# Altium PCB pblaze_ext.PcbDoc
Units mil, origin at the board's own origin, x right, y up, seen from the top; angles counter-clockwise.
Board outline 6000 x 4000 mil, 2 copper layers (Top Layer, Bottom Layer); 18 components, 80 nets, 236 pads, 45 vias.
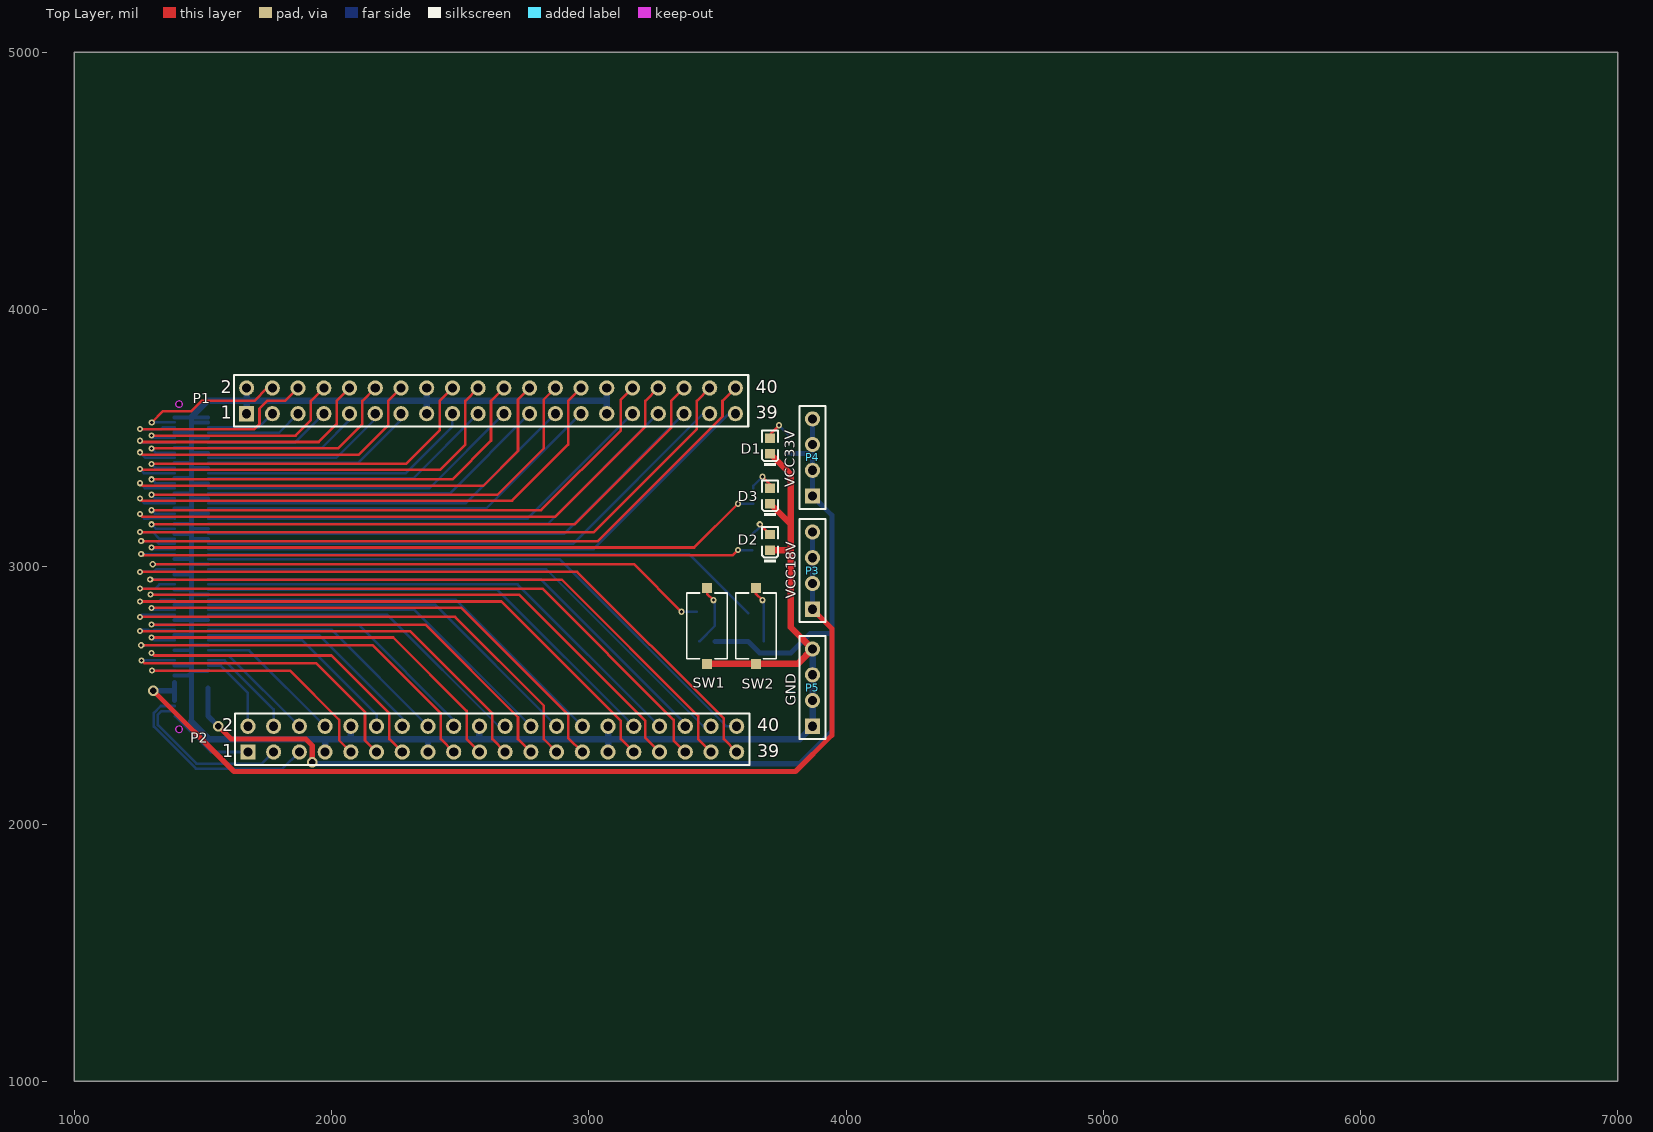
[diagram p0: Top Layer view]
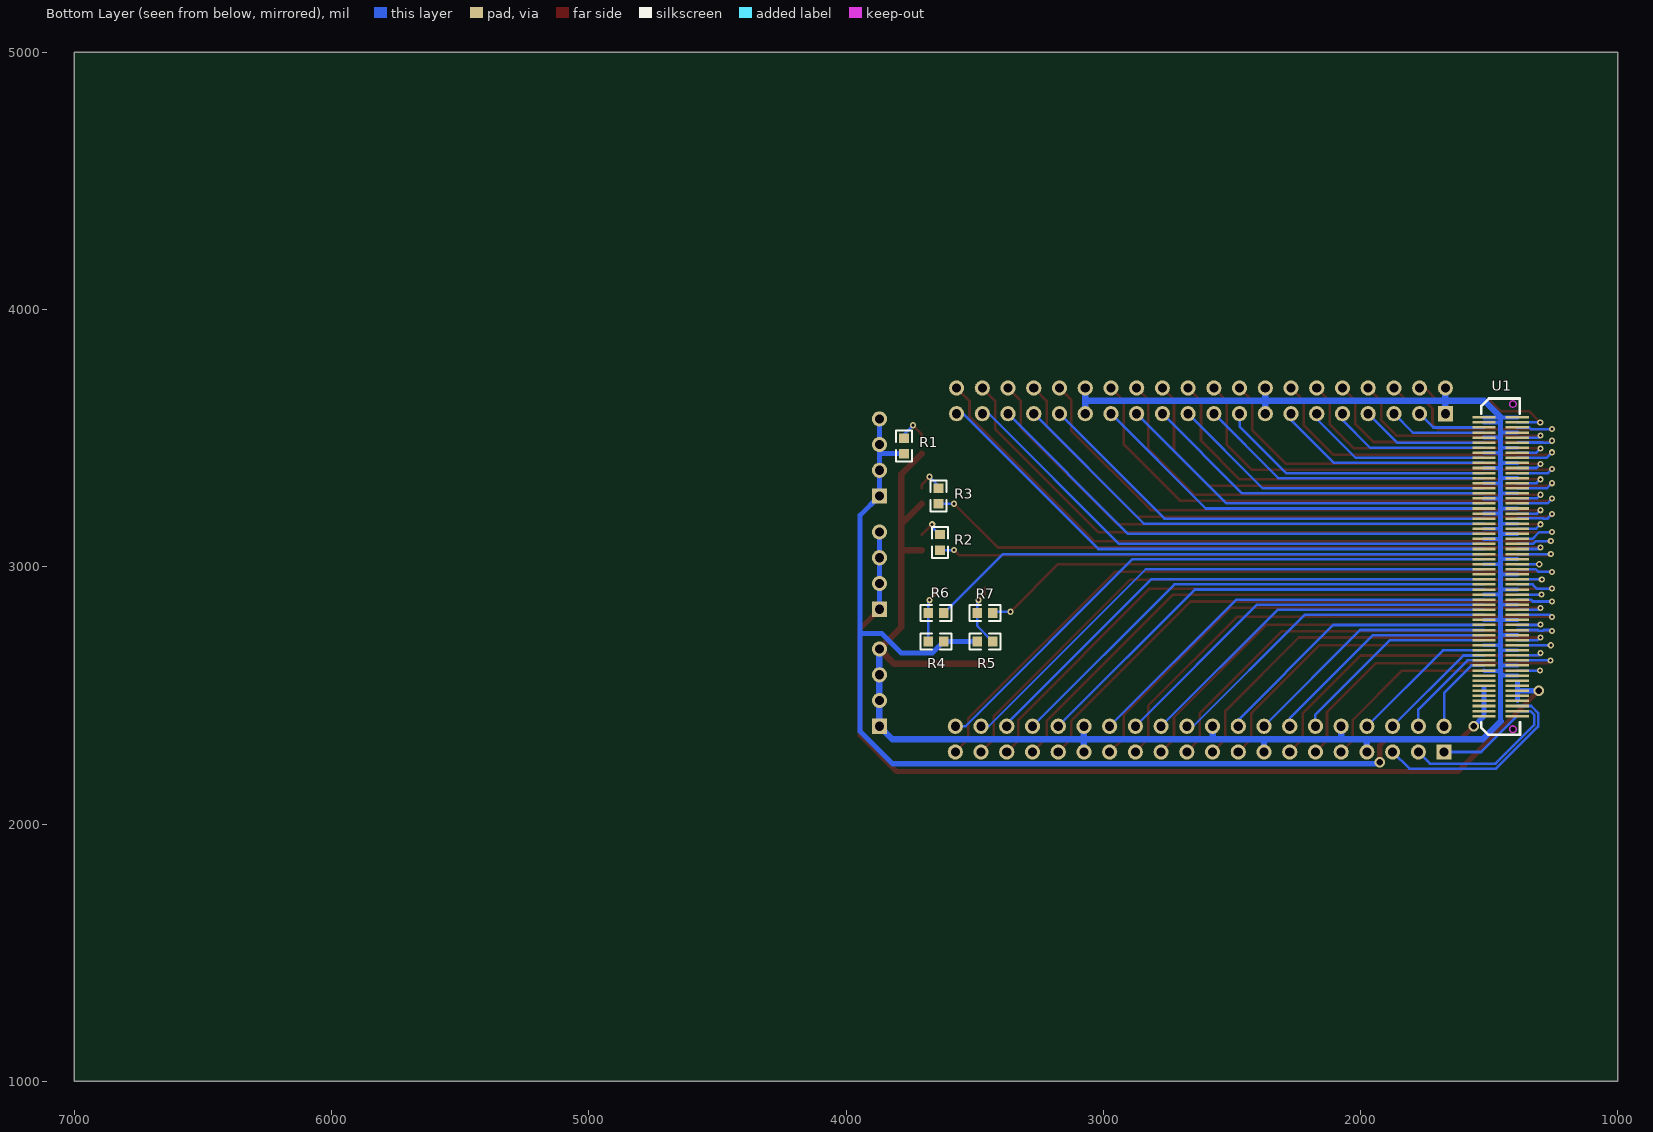
[diagram p1: Bottom Layer view, seen from below]
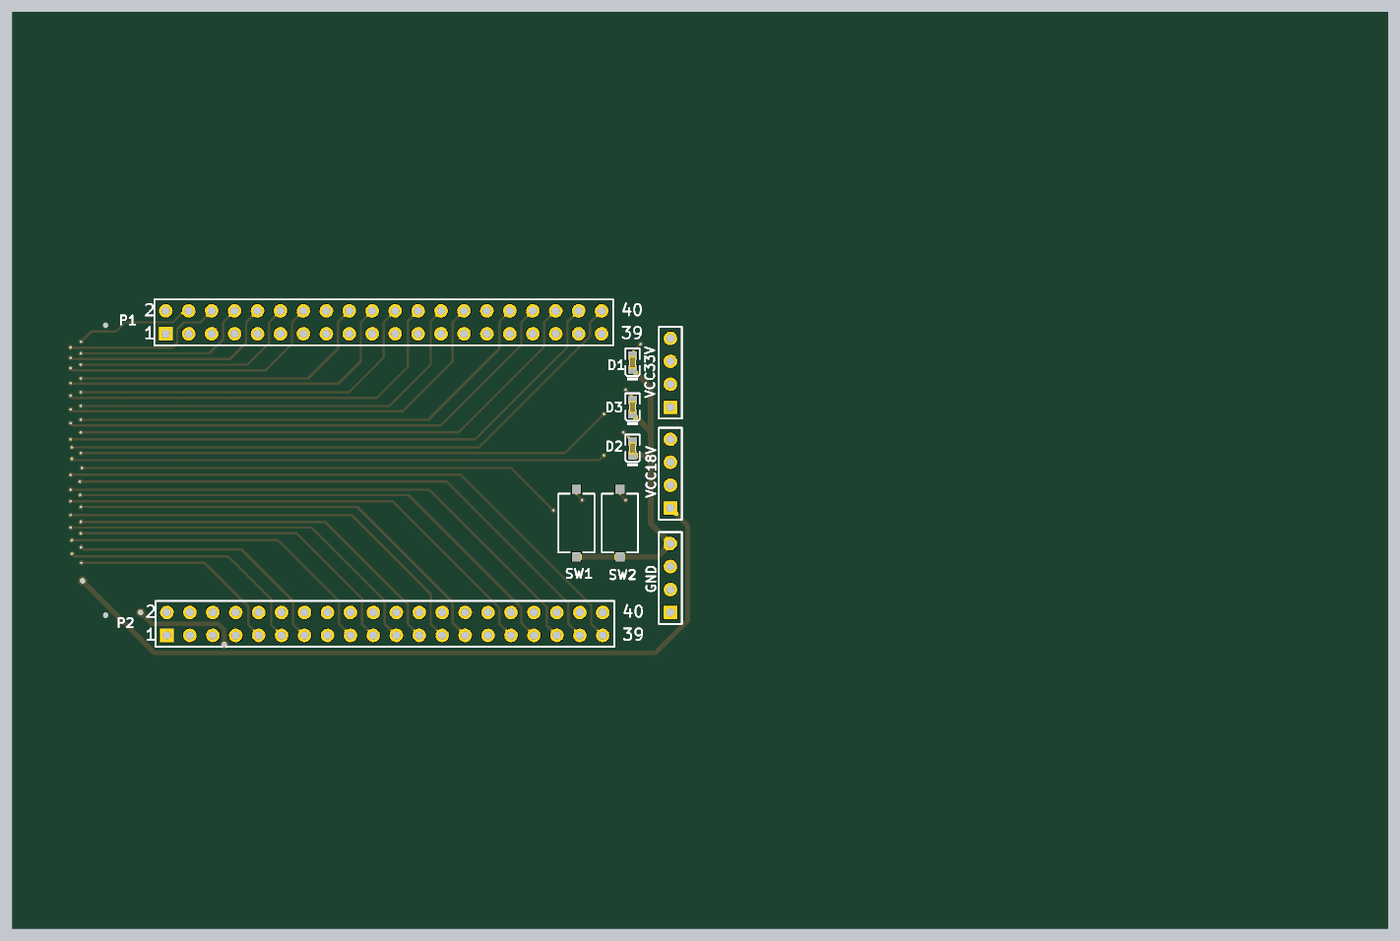
[diagram p2: 3D render of the assembled board from above, using the file's embedded part models]
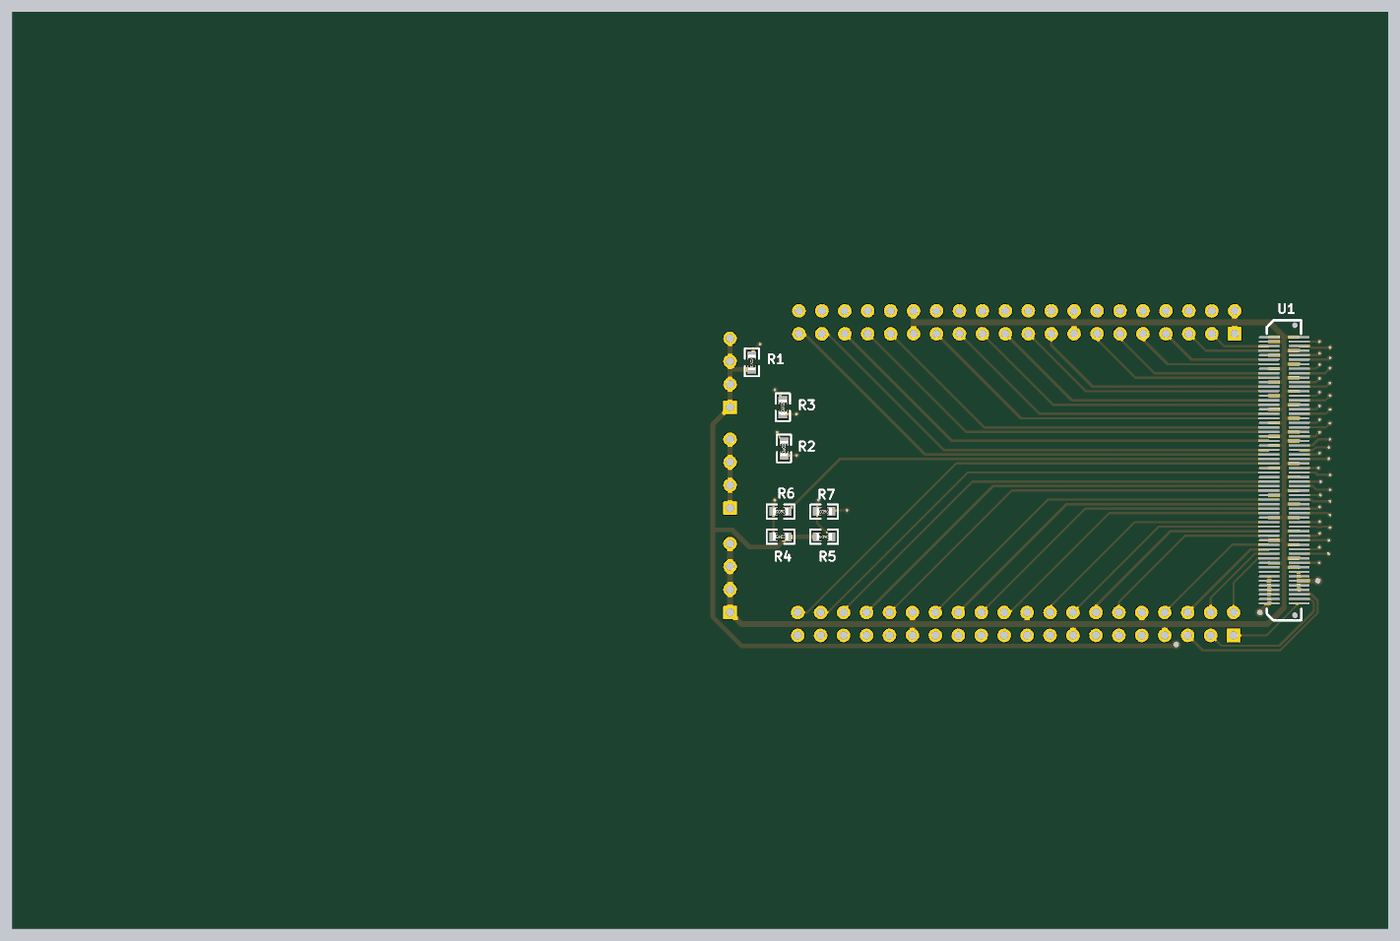
[diagram p3: 3D render of the assembled board from below, using the file's embedded part models]

## Layer stack, top to bottom
Top Solder: solder mask 0.4, Solder Resist, Dk 3.5
Top Layer: signal copper 1.4
Dielectric 1: dielectric 12.6, FR-4, Dk 4.8
Bottom Layer: signal copper 1.4
Bottom Solder: solder mask 0.4, Solder Resist, Dk 3.5

## Board outline
1000,1000 7000,1000 7000,5000 1000,5000

## Design rules (kind name [scope] priority, off if disabled: settings)
Clearance [All] p1: gap=6
MinimumSolderMaskSliver [All] p1 off: minsoldermaskwidth=10
PolygonConnect [All] p1: connectstyle=Relief reliefconductorwidth=10 reliefentries=4 polygonreliefangle="90 Angle" airgapwidth=10
RoutingVias [All] p1: holewidth=20 width=50 viastyle="Through Hole" minholewidth=12 minwidth=24 maxholewidth=60 maxwidth=80
SilkToSilkClearance [All] p1 off: silktosilkclearance=10
SilkToSolderMaskClearance [IsPad] p1 off: minsilkscreentomaskgap=10 clearancetoexposedcopper=TRUE
SolderMaskExpansion [All] p1: expansion=4
Width [All] p1: maxlimit=100 minlimit=6 preferedwidth=10
27 further rules are at their usual default settings.

## Components (designator, comment, footprint, x,y, rotation, side; value= is the part's Value field where it differs from the comment)
D1 "LED 0603" 0603_LED_S1 3705,3470 r90 top
D2 "LED 0603" 0603_LED_S1 3705,3095 r90 top
D3 "LED 0603" 0603_LED_S1 3705,3275 r90 top
P1 "Header 20X2" HDR2X20 1670,3595 r0 top
P2 "Header 20X2" HDR2X20 1675,2280 r0 top
P3 "VCC18V" HDR1X4 3870,2835 r90 top
P4 "VCC33V" HDR1X4 3870,3275 r90 top
P5 "GND" HDR1X4 3870,2380 r90 top
R1 "10K" 0603_R 3775,3470 r90 bottom
R2 "1K" 0603_R 3635,3095 r90 bottom
R3 "1K" 0603_R 3640,3275 r90 bottom
R4 "10K" 0603_R 3650,2710 r180 bottom
R5 "10K" 0603_R 3460,2710 r0 bottom
R6 "1K" 0603_R 3650,2820 r0 bottom
R7 "1K" 0603_R 3460,2820 r0 bottom
SW1 "SW-PB" "SW-2- 3.8X7.6-S" 3460,2770 r0 top
SW2 "SW-PB" "SW-2- 3.8X7.6-S" 3650,2770 r0 top
U1 "AXK6A2337YG" CONN-SMD_120P-P0.50_AXK6A2337YG 1454.96,3000.12 r90 bottom

## Footprints (in the part's own frame and the unit in brackets; to place one, negate y for a bottom-side part, rotate by r counter-clockwise, add the part's x,y. Pads: shape width x height; smd on the part's side, far side on the other; paste and mask are expansions set on the pad)
0603_LED_S1 [mm]
  rect 0.93x0.98 smd: A(0.77,0) K(-0.77,0)
  silkscreen extent -1.98,-0.79 1.54,0.79, body extent -0.8,-0.4 0.8,0.4, height 0.6
0603_R [mm]
  rect 0.93x0.98 smd: 1(-0.77,0) 2(0.77,0)
  silkscreen extent -1.53,-0.79 1.54,0.79, body extent -0.85,-0.4 0.85,0.4, height 0.56
CONN-SMD_120P-P0.50_AXK6A2337YG [mm]
  rect 0.25x2.3 smd paste+0 mask+0.05: 1(-14.75,1.65) 2(-14.75,-1.65) 3(-14.25,1.65) 4(-14.25,-1.65) 5(-13.75,1.65) 6(-13.75,-1.65) 7(-13.25,1.65) 8(-13.25,-1.65) 9(-12.75,1.65) 10(-12.75,-1.65) 11(-12.25,1.65) 12(-12.25,-1.65) 13(-11.75,1.65) 14(-11.75,-1.65) 15(-11.25,1.65) 16(-11.25,-1.65) 17(-10.75,1.65) 18(-10.75,-1.65) 19(-10.25,1.65) 20(-10.25,-1.65) 21(-9.75,1.65) 22(-9.75,-1.65) 23(-9.25,1.65) 24(-9.25,-1.65) 25(-8.75,1.65) 26(-8.75,-1.65) 27(-8.25,1.65) 28(-8.25,-1.65) 29(-7.75,1.65) 30(-7.75,-1.65) 31(-7.25,1.65) 32(-7.25,-1.65) 33(-6.75,1.65) 34(-6.75,-1.65) 35(-6.25,1.65) 36(-6.25,-1.65) 37(-5.75,1.65) 38(-5.75,-1.65) 39(-5.25,1.65) 40(-5.25,-1.65) 41(-4.75,1.65) 42(-4.75,-1.65) 43(-4.25,1.65) 44(-4.25,-1.65) 45(-3.75,1.65) 46(-3.75,-1.65) 47(-3.25,1.65) 48(-3.25,-1.65) 49(-2.75,1.65) 50(-2.75,-1.65) 51(-2.25,1.65) 52(-2.25,-1.65) 53(-1.75,1.65) 54(-1.75,-1.65) 55(-1.25,1.65) 56(-1.25,-1.65) 57(-0.75,1.65) 58(-0.75,-1.65) 59(-0.25,1.65) 60(-0.25,-1.65) 61(0.25,1.65) 62(0.25,-1.65) 63(0.75,1.65) 64(0.75,-1.65) 65(1.25,1.65) 66(1.25,-1.65) 67(1.75,1.65) 68(1.75,-1.65) 69(2.25,1.65) 70(2.25,-1.65) 71(2.75,1.65) 72(2.75,-1.65) 73(3.25,1.65) 74(3.25,-1.65) 75(3.75,1.65) 76(3.75,-1.65) 77(4.25,1.65) 78(4.25,-1.65) 79(4.75,1.65) 80(4.75,-1.65) 81(5.25,1.65) 82(5.25,-1.65) 83(5.75,1.65) 84(5.75,-1.65) 85(6.25,1.65) 86(6.25,-1.65) 87(6.75,1.65) 88(6.75,-1.65) 89(7.25,1.65) 90(7.25,-1.65) 91(7.75,1.65) 92(7.75,-1.65) 93(8.25,1.65) 94(8.25,-1.65) 95(8.75,1.65) 96(8.75,-1.65) 97(9.25,1.65) 98(9.25,-1.65) 99(9.75,1.65) 100(9.75,-1.65) 101(10.25,1.65) 102(10.25,-1.65) 103(10.75,1.65) 104(10.75,-1.65) 105(11.25,1.65) 106(11.25,-1.65) 107(11.75,1.65) 108(11.75,-1.65) 109(12.25,1.65) 110(12.25,-1.65) 111(12.75,1.65) 112(12.75,-1.65) 113(13.25,1.65) 114(13.25,-1.65) 115(13.75,1.65) 116(13.75,-1.65) 117(14.25,1.65) 118(14.25,-1.65) 119(14.75,1.65) 120(14.75,-1.65)
  Keep-Out Layer circle w0.005: c-16.05,-1.2 r0.325
  Keep-Out Layer circle w0.005: c16.05,-1.2 r0.325
  Keep-Out Layer board cut-out: -16.05,-0.875 -16.115,-0.875 -16.234,-0.924 -16.325,-1.016 -16.375,-1.135 -16.375,-1.265 -16.325,-1.384 -16.234,-1.475 -16.115,-1.525 -16.05,-1.525 -15.985,-1.525 -15.866,-1.475 -15.774,-1.384 -15.725,-1.265 -15.725,-1.135 -15.774,-1.016 -15.866,-0.924 -15.985,-0.875 -16.05,-0.875 -16.05,-0.875
  Keep-Out Layer board cut-out: 16.05,-0.875 15.985,-0.875 15.866,-0.924 15.775,-1.016 15.725,-1.135 15.725,-1.265 15.775,-1.384 15.866,-1.475 15.985,-1.525 16.05,-1.525 16.115,-1.525 16.234,-1.475 16.326,-1.384 16.375,-1.265 16.375,-1.135 16.326,-1.016 16.234,-0.924 16.115,-0.875 16.05,-0.875 16.05,-0.875
  Keep-Out Layer region: -16.05,-0.875 -16.115,-0.875 -16.234,-0.924 -16.325,-1.016 -16.375,-1.135 -16.375,-1.265 -16.325,-1.384 -16.234,-1.475 -16.115,-1.525 -16.05,-1.525 -15.985,-1.525 -15.866,-1.475 -15.774,-1.384 -15.725,-1.265 -15.725,-1.135 -15.774,-1.016 -15.866,-0.924 -15.985,-0.875 -16.05,-0.875 -16.05,-0.875
  Keep-Out Layer region: 16.05,-0.875 15.985,-0.875 15.866,-0.924 15.775,-1.016 15.725,-1.135 15.725,-1.265 15.775,-1.384 15.866,-1.475 15.985,-1.525 16.05,-1.525 16.115,-1.525 16.234,-1.475 16.326,-1.384 16.375,-1.265 16.375,-1.135 16.326,-1.016 16.234,-0.924 16.115,-0.875 16.05,-0.875 16.05,-0.875
  silkscreen extent -16.61,-1.91 16.61,1.9
HDR1X4 [mm] "Connector; Header; 4 Position"
  rect 1.5x1.5 hole 0.9: 1(0,0)
  round 1.5 hole 0.9: 2(2.54,0) 3(5.08,0) 4(7.62,0)
  silkscreen extent -1.27,-1.27 8.89,1.27
HDR2X20 [mm] "Connector; Header; 20x2 Position"
  rect 1.5x1.5 hole 0.9: 1(0,0)
  round 1.5 hole 0.9: 2(0,2.54) 3(2.54,0) 4(2.54,2.54) 5(5.08,0) 6(5.08,2.54) 7(7.62,0) 8(7.62,2.54) 9(10.16,0) 10(10.16,2.54) 11(12.7,0) 12(12.7,2.54) 13(15.24,0) 14(15.24,2.54) 15(17.78,0) 16(17.78,2.54) 17(20.32,0) 18(20.32,2.54) 19(22.86,0) 20(22.86,2.54) 21(25.4,0) 22(25.4,2.54) 23(27.94,0) 24(27.94,2.54) 25(30.48,0) 26(30.48,2.54) 27(33.02,0) 28(33.02,2.54) 29(35.56,0) 30(35.56,2.54) 31(38.1,0) 32(38.1,2.54) 33(40.64,0) 34(40.64,2.54) 35(43.18,0) 36(43.18,2.54) 37(45.72,0) 38(45.72,2.54) 39(48.26,0) 40(48.26,2.54)
  silkscreen extent -1.27,-1.27 49.53,3.81
"SW-2- 3.8X7.6-S" [mm]
  rect 1x1 smd: 1(0,-3.75) 2(0,3.75)
  silkscreen extent -2,-3.25 2,3.25, body extent -1.92,-3.99 1.92,3.9, height 2.5

## Part data
D1 D2 D3: library part "0603 红灯", "发光二极管"
P1 P2: "Header, 20-Pin, Dual row"
P3 P4 P5: library part "Header 4", "Header, 4-Pin"
R1 R2 R3 R4 R5 R6 R7: library part "0603 1KΩ (1001) 1%", "贴片电阻"
SW1 SW2: "按钮开关"

## Via types
v1: diameter 24, hole 12, Top Layer to Bottom Layer, tented both sides, 42 vias
v2: diameter 40, hole 25, Top Layer to Bottom Layer, tented both sides, 3 vias

## Nets (pads, with @x,y where several pads share a name; then routed paths per layer and width w, separated by ;. In a path a pad name is that pad's centre, name@x,y a point inside that pad or via, vN(x,y) a via of type N, cw(c..) or ccw(c..) an arc to the next point about the centre after c; other vN are vias at no path point)
GND: D1.K D2.K D3.K P1.1 P1.2 P1.15 P1.16 P1.29 P1.30 P2.7 P2.10 P2.15 P2.20 P2.29 P2.30 P5.1 P5.2 P5.3 P5.4 SW1.1 SW2.1 U1.18 U1.19 U1.22 U1.28 U1.29 U1.34 U1.39 U1.40 U1.46 U1.49 U1.52 U1.58 U1.61 U1.64 U1.71 U1.74 U1.75 U1.78 U1.81 U1.84 U1.87 U1.90 U1.93 U1.96 U1.99 U1.102 U1.105 U1.108 U1.111 U1.114 U1.117 U1.119 U1.120 | length 9816.9
  Top Layer w25: SW1.1 SW2.1 3812.36,2622.36 P5.4 3785,2765 3785,3060 ; D2.K 3780.31,3064.69 3785,3060 ; D3.K 3785,3164.69 ; D1.K 3785,3359.69 3785,3164.69 ; 3785,3060 3785,3164.69
  Bottom Layer w15: U1.18 1442.72,2576.89 1455,2589.17 1461.14,2595.31 1518.66,2595.31 U1.19 ; U1.22 1453.74,2616.26 ; U1.28 1450.31,2675.31 1455,2680 ; U1.34 1454.37,2734.37 1455,2735 ; U1.40 1455,2793.43 U1.39 ; U1.46 1452.52,2852.48 1455,2850 ; U1.52 1453.46,2911.54 1455,2910 ; U1.58 1454.41,2970.59 1455,2970 ; U1.64 1454.65,3029.65 1455,3030 ; U1.74 1453.07,3128.07 1455,3130 ; U1.78 1452.56,3167.44 1455,3165 ; U1.84 1451.5,3226.5 1455,3230 ; U1.90 1454.45,3285.55 1455,3285 ; U1.96 1454.61,3344.61 1455,3345 ; U1.102 1451.34,3403.66 1455,3400 ; U1.108 1452.28,3462.72 1455,3460 ; U1.114 1451.77,3521.77 1455,3525 ; U1.120 1455,3580.83 U1.119 ; 1455,2695 U1.29 ; 1455,2895 1458.15,2891.85 U1.49 ; 1455,3010 1455.04,3009.96 U1.61 ; 1455,3110 1456.62,3108.38 U1.71 ; 1455,3145 1457.76,3147.76 U1.75 ; 1455,3205 1456.81,3206.81 U1.81 ; 1455,3265 1455.87,3265.87 U1.87 ; 1455,3325 1455.08,3324.92 U1.93 ; 1455,3390 1461.02,3383.98 U1.99 ; 1455,3450 1461.97,3443.03 U1.105 ; 1455,3505 1457.91,3502.09 U1.111 ; 1455,3560 1456.14,3561.14 U1.117
  Bottom Layer w20: 1453.74,2616.26 1455,2617.52 ; 1455,2400 1455,2589.17 1455,2617.52 ; 1455,3580.83 1455,3560 1455,3525 1455,3505 1455,3460 1455,3450 1455,3400 1455,3390 1455,3345 1455,3325 1455,3285 1455,3265 1455,3230 1455,3205 1455,3165 1455,3145 1455,3130 1455,3110 1455,3030 1455,3010 1455,2970 1455,2910 1455,2895 1455,2850 1455,2793.43 1455,2735 1455,2695 1455,2680 1455,2617.52
  Bottom Layer w25: 1455,2400 1525,2330 1975,2330 ; 1455,3580.83 1519.17,3645 1670,3645 ; P1.1 1670,3645 ; P1.2 1670,3645 ; P2.7 1975,2330 ; P2.10 2075,2330 ; P1.15 2370,3645 ; P1.16 2370,3645 ; P2.15 2375,2325 2380,2330 ; P2.20 2575,2330 ; 3070,2330 2575,2330 ; P1.29 3070,3645 ; P1.30 3070,3645 ; P2.29 3075,2330 ; P2.30 3075,2330 ; P5.4 P5.3 P5.2 P5.1 3820,2330 3075,2330 ; 1670,3645 2370,3645 ; 1975,2330 2075,2330 ; 2075,2330 2380,2330 ; 2370,3645 3070,3645 ; 2380,2330 2575,2330
KEY1: R7.1 U1.62 | length 2276.6
  Top Layer w10: v1(1305,3009.92) 3175.08,3009.92 v1(3360,2825)
  Bottom Layer w10: v1(1305,3009.92) 1305.04,3009.96 U1.62 ; v1(3360,2825) R7.1@3420,2825
KEY2: R6.1 U1.65 | length 2194.8
  Bottom Layer w10: U1.65 3390.36,3049.33 R6.1
LED1: R2.1 U1.66 | length 2516.6
  Top Layer w10: v1(1260,3050) 1266,3044 3559,3044 v1(3580,3065)
  Bottom Layer w10: v1(1260,3050) 1260.67,3049.33 U1.66 ; v1(3580,3065) 3634.69,3065 R2.1
LED2: R3.1 U1.68 | length 2503
  Top Layer w10: v1(1300,3075) 3410,3075 v1(3580,3245)
  Bottom Layer w10: v1(1300,3075) 1305.98,3069.02 U1.68 ; v1(3580,3245) 3639.69,3245 R3.1
NetD1_A: D1.A R1.2 | length 128.4
  Top Layer w10: D1.A 3705,3515 v1(3740,3550)
  Bottom Layer w10: v1(3740,3550) 3775,3515 R1.2
NetD2_A: D2.A R2.2 | length 108.5
  Top Layer w10: v1(3665,3165) 3665.32,3165 D2.A
  Bottom Layer w10: R2.2 3665,3155.32 v1(3665,3165)
NetD3_A: D3.A R3.2 | length 116.3
  Top Layer w10: v1(3675,3350) 3705,3320 D3.A
  Bottom Layer w10: R3.2 3640,3315 v1(3675,3350)
NetP1_3: P1.3 U1.115 | length 272.3
  Bottom Layer w10: U1.115 1716.46,3541.46 P1.3
NetP1_4: P1.4 U1.118 | length 613.2
  Top Layer w10: v1(1301.14,3561.14) 1345,3605 1455,3605 1495,3645 1700,3645 1750,3695 P1.4
  Bottom Layer w10: v1(1301.14,3561.14) U1.118
NetP1_5: P1.5 U1.113 | length 380.4
  Bottom Layer w10: U1.113 1796.77,3521.77 P1.5
NetP1_6: P1.6 U1.116 | length 854.1
  Top Layer w10: v1(1255,3535) 1700,3535 1720,3555 1720,3615 1750,3645 1820,3645 P1.6
  Bottom Layer w10: v1(1255,3535) 1337.48,3535 1343.94,3541.46 U1.116
NetP1_7: P1.7 U1.109 | length 496.7
  Bottom Layer w10: U1.109 1857.4,3482.4 P1.7
NetP1_8: P1.8 U1.112 | length 883.8
  Top Layer w10: v1(1300,3510) 1860,3510 1920,3570 1920,3645 P1.8
  Bottom Layer w10: v1(1300,3510) 1307.91,3502.09 U1.112
NetP1_9: P1.9 U1.107 | length 619.5
  Bottom Layer w10: U1.107 1962.72,3462.72 2070,3570 P1.9
NetP1_10: P1.10 U1.110 | length 1095.4
  Top Layer w10: v1(1255,3490) 1260,3485 1950,3485 2020,3555 2020,3645 P1.10
  Bottom Layer w10: v1(1255,3490) 1262.6,3482.4 1289.87,3482.4 1290.47,3483 1389.4,3483 U1.110
NetP1_11: P1.11 U1.103 | length 732.9
  Bottom Layer w10: U1.103 2018.35,3423.35 2170,3575 P1.11
NetP1_12: P1.12 U1.106 | length 1117.1
  Top Layer w10: v1(1300,3460) 2025,3460 2120,3555 2120,3645 P1.12
  Bottom Layer w10: v1(1300,3460) 1316.97,3443.03 U1.106
NetP1_13: P1.13 U1.101 | length 844
  Bottom Layer w10: U1.101 2103.66,3403.66 2270,3570 P1.13
NetP1_14: P1.14 U1.104 | length 1326.5
  Top Layer w10: v1(1255,3445) 1265,3435 2105,3435 2220,3550 2220,3645 P1.14
  Bottom Layer w10: v1(1255,3445) 1276.65,3423.35 U1.104
NetP1_17: P1.17 U1.97 | length 1074.9
  Bottom Layer w10: U1.97 2289.29,3364.29 2470,3545 P1.17
NetP1_18: P1.18 U1.100 | length 1456.2
  Top Layer w10: v1(1300,3400) 2290,3400 2420,3530 2420,3645 P1.18
  Bottom Layer w10: v1(1300,3400) 1316.02,3383.98 U1.100
NetP1_19: P1.19 U1.95 | length 1153.8
  Bottom Layer w10: U1.95 2319.61,3344.61 P1.19
NetP1_20: P1.20 U1.98 | length 1689.1
  Top Layer w10: v1(1255,3380) 1258,3377 2422,3377 2520,3475 2520,3645 P1.20
  Bottom Layer w10: v1(1255,3380) 1270.71,3364.29 U1.98
NetP1_21: P1.21 U1.91 | length 1270.1
  Bottom Layer w10: U1.91 2380.24,3305.24 P1.21
NetP1_22: P1.22 U1.94 | length 1704.1
  Top Layer w10: v1(1300,3340) 2470,3340 2620,3490 2620,3645 P1.22
  Bottom Layer w10: v1(1300,3340) 1315.08,3324.92 U1.94
NetP1_23: P1.23 U1.89 | length 1378.3
  Bottom Layer w10: U1.89 2460.55,3285.55 P1.23
NetP1_24: P1.24 U1.92 | length 1936.9
  Top Layer w10: v1(1255,3325) 1265,3315 2590,3315 2725,3450 2725,3650 P1.24
  Bottom Layer w10: v1(1255,3325) 1274.76,3305.24 U1.92
NetP1_25: P1.25 U1.85 | length 1494.6
  Bottom Layer w10: U1.85 2521.18,3246.18 P1.25
NetP1_26: P1.26 U1.88 | length 1949.1
  Top Layer w10: v1(1300,3280) 2645,3280 2825,3460 2825,3650 P1.26
  Bottom Layer w10: v1(1300,3280) 1314.13,3265.87 U1.88
NetP1_27: P1.27 U1.83 | length 1602.7
  Bottom Layer w10: U1.83 2601.5,3226.5 P1.27
NetP1_28: P1.28 U1.86 | length 2142.1
  Top Layer w10: v1(1255,3265) 1263,3257 2702,3257 2920,3475 2920,3645 P1.28
  Bottom Layer w10: v1(1255,3265) 1273.82,3246.18 U1.86
NetP1_31: P1.31 U1.79 | length 1819
  Bottom Layer w10: U1.79 2762.13,3187.13 P1.31
NetP1_32: P1.32 U1.82 | length 2232.5
  Top Layer w10: v1(1300,3220) 2815,3220 3125,3530 3125,3650 P1.32
  Bottom Layer w10: v1(1300,3220) 1313.19,3206.81 U1.82
NetP1_33: P1.33 U1.77 | length 1927.2
  Bottom Layer w10: U1.77 2842.44,3167.44 P1.33
NetP1_34: P1.34 U1.80 | length 2428
  Top Layer w10: v1(1255,3205) 1265,3195 2870,3195 3220,3545 3220,3645 P1.34
  Bottom Layer w10: v1(1255,3205) 1272.87,3187.13 1289.6,3187.13 1290.47,3188 1389.13,3188 U1.80
NetP1_35: P1.35 U1.73 | length 2043.5
  Bottom Layer w10: U1.73 2903.07,3128.07 P1.35
NetP1_36: P1.36 U1.76 | length 2448.2
  Top Layer w10: v1(1300,3165) 2945,3165 3320,3540 3320,3645 P1.36
  Bottom Layer w10: v1(1300,3165) 1317.24,3147.76 U1.76
NetP1_37: P1.37 U1.69 | length 2159.8
  Bottom Layer w10: U1.69 2938.7,3088.7 3445,3595 P1.37
NetP1_38: P1.38 U1.72 | length 2657.4
  Top Layer w10: v1(1255,3135) 3020,3135 3420,3535 3420,3645 P1.38
  Bottom Layer w10: v1(1255,3135) 1305,3135 1331.62,3108.38 U1.72
NetP1_39: P1.39 U1.67 | length 2267.9
  Bottom Layer w10: U1.67 3019.02,3069.02 3545,3595 P1.39
NetP1_40: P1.40 U1.70 | length 2726.3
  Top Layer w10: v1(1260,3100) 3035,3100 3520,3585 3520,3645 P1.40
  Bottom Layer w10: v1(1260,3100) 1317.37,3100 1328.67,3088.7 U1.70
NetP2_1: P2.1 U1.2 | length 342.7
  Bottom Layer w10: U1.2 1391.6,2419.41 1531.01,2280 P2.1
NetP2_2: P2.2 U1.21 | length 329.1
  Bottom Layer w10: U1.21 1568.74,2616.26 1675,2510 P2.2
NetP2_3: P2.3 U1.4 | length 641.6
  Bottom Layer w10: U1.4 1339.09,2439.09 1325,2425 1325,2385 1475,2235 1730,2235 P2.3
NetP2_4: P2.4 U1.23 | length 399.2
  Bottom Layer w10: U1.23 1584.06,2635.94 1775,2445 P2.4
NetP2_5: P2.5 U1.6 | length 806.1
  Bottom Layer w10: U1.6 1336.15,2458.78 1309,2431.63 1309,2378.37 1472.37,2215 1810,2215 P2.5
NetP2_6: P2.6 U1.25 | length 469.2
  Bottom Layer w10: U1.25 1520.55,2655 1600,2655 P2.6
NetP2_8: P2.8 U1.27 | length 577.4
  Bottom Layer w10: U1.27 1679.69,2675.31 P2.8
NetP2_9: P2.9 U1.20 | length 1039.9
  Top Layer w10: v1(1301.57,2596.57) 1838.43,2596.57 2030,2405 2030,2325 P2.9
  Bottom Layer w10: v1(1301.57,2596.57) U1.20
NetP2_11: P2.11 U1.24 | length 1255
  Top Layer w10: v1(1260.94,2635.94) 1271.88,2625 1940,2625 2130,2435 2130,2325 P2.11
  Bottom Layer w10: v1(1260.94,2635.94) U1.24
NetP2_12: P2.12 U1.31 | length 820.1
  Bottom Layer w10: U1.31 1885.32,2714.68 2175,2425 P2.12
NetP2_13: P2.13 U1.26 | length 1290.3
  Top Layer w10: v1(1300.63,2664.37) 1310,2655 2000,2655 2225,2430 2225,2330 P2.13
  Bottom Layer w10: v1(1300.63,2664.37) 1300.63,2655.63 U1.26
NetP2_14: P2.14 U1.33 | length 919.4
  Bottom Layer w10: U1.33 1950.63,2734.37 2275,2410 P2.14
NetP2_16: P2.16 U1.35 | length 1010
  Bottom Layer w10: U1.35 2000.95,2754.05 P2.16
NetP2_17: P2.17 U1.30 | length 1575.5
  Top Layer w10: v1(1260,2695) 2160,2695 2425,2430 2425,2330 P2.17
  Bottom Layer w10: v1(1260,2695) U1.30
NetP2_18: P2.18 U1.37 | length 1132.8
  Bottom Layer w10: U1.37 2106.26,2773.74 2475,2405 P2.18
NetP2_19: P2.19 U1.32 | length 1618
  Top Layer w10: v1(1300,2725) 2240,2725 2525,2440 2525,2330 P2.19
  Bottom Layer w10: v1(1300,2725) 1310.32,2714.68 U1.32
NetP2_21: P2.21 U1.36 | length 1811.6
  Top Layer w10: v1(1255,2750) 2305,2750 2625,2430 2625,2330 P2.21
  Bottom Layer w10: v1(1255,2750) 1259.05,2754.05 1288.42,2754.05 1290.47,2752 1309.53,2752 1311.58,2754.05 U1.36
NetP2_22: P2.22 U1.41 | length 1334.5
  Bottom Layer w10: U1.41 2216.89,2813.11 2650,2380 P2.22
NetP2_23: P2.23 U1.38 | length 1820.3
  Top Layer w10: v1(1300,2775) 2365,2775 2725,2415 2725,2330 P2.23
  Bottom Layer w10: v1(1300,2775) 1301.26,2773.74 U1.38
NetP2_24: P2.24 U1.43 | length 1442.6
  Bottom Layer w10: U1.43 2322.2,2832.8 P2.24
NetP2_25: P2.25 U1.42 | length 2052
  Top Layer w10: v1(1255,2805) 2480,2805 2825,2460 2825,2330 P2.25
  Bottom Layer w10: v1(1255,2805) 1263.11,2813.11 U1.42
NetP2_26: P2.26 U1.45 | length 1550.8
  Bottom Layer w10: U1.45 2402.52,2852.48 P2.26
NetP2_27: P2.27 U1.44 | length 2052.7
  Top Layer w10: v1(1300,2840) 2505,2840 2920,2425 2920,2335 P2.27
  Bottom Layer w10: v1(1300,2840) 1307.2,2832.8 U1.44
NetP2_28: P2.28 U1.47 | length 1658.9
  Bottom Layer w10: U1.47 2482.83,2872.17 P2.28
NetP2_31: P2.31 U1.48 | length 2341.3
  Top Layer w10: v1(1255,2865) 2660,2865 3125,2400 3125,2330 P2.31
  Bottom Layer w10: v1(1255,2865) 1330,2865 1337.17,2872.17 U1.48
NetP2_32: P2.32 U1.51 | length 1875.3
  Bottom Layer w10: U1.51 2643.46,2911.54 P2.32
NetP2_33: P2.33 U1.50 | length 2362.8
  Top Layer w10: v1(1296.85,2891.85) 2728.15,2891.85 3220,2400 3220,2335 P2.33
  Bottom Layer w10: v1(1296.85,2891.85) U1.50
NetP2_34: P2.34 U1.53 | length 1983.4
  Bottom Layer w10: U1.53 2723.78,2931.22 P2.34
NetP2_35: P2.35 U1.54 | length 2571.6
  Top Layer w10: v1(1255,2915) 2820,2915 3330,2405 3330,2325 P2.35
  Bottom Layer w10: v1(1255,2915) 1315,2915 1331.22,2931.22 U1.54
NetP2_36: P2.36 U1.55 | length 2097.4
  Bottom Layer w10: U1.55 2814.09,2950.91 3375,2390 P2.36
NetP2_37: P2.37 U1.56 | length 2605.6
  Top Layer w10: v1(1295,2950) 2895,2950 3425,2420 3425,2330 P2.37
  Bottom Layer w10: v1(1295,2950) 1295.91,2950.91 U1.56
NetP2_38: P2.38 U1.59 | length 2207.9
  Bottom Layer w10: U1.59 2834.72,2990.28 3445,2380 P2.38
NetP2_39: P2.39 U1.60 | length 2796.1
  Top Layer w10: v1(1255,2980) 2955,2980 3525,2410 3525,2330 P2.39
  Bottom Layer w10: v1(1255,2980) 1307.61,2980 1317.89,2990.28 U1.60
NetP2_40: P2.40 U1.63 | length 2324.2
  Bottom Layer w10: U1.63 2885.35,3029.65 3535,2380 P2.40
NetR4_1: R4.1 R6.2 SW2.2 | length 220.2
  Top Layer w10: SW2.2 3650,2895 v1(3675,2870)
  Bottom Layer w10: v1(3675,2870) 3680.32,2864.68 R6.2 R4.1
NetR5_1: R5.1 R7.2 SW1.2 | length 245.3
  Top Layer w10: SW1.2 3460,2895 v1(3485,2870)
  Bottom Layer w10: R5.1 3490.32,2770.63 R7.2 3490.32,2864.68 v1(3485,2870)
VCC18: P3.1 P3.2 P3.3 P3.4 U1.8 U1.10 U1.12 U1.14 U1.16 | length 3800.3
  Top Layer w20: v2(1307.17,2517.83) 1621,2204 3804,2204 3945,2345 3945,2760 P3.1
  Bottom Layer w20: v2(1307.17,2517.83) U1.12 ; U1.8@1390,2479.78 U1.10 U1.12 ; 1390,2550 U1.14 U1.12 ; P3.1 P3.2 P3.3 P3.4
VCC33: P4.1 P4.2 P4.3 P4.4 R1.1 R4.2 R5.2 U1.1 U1.3 U1.5 U1.7 U1.9 U1.11 U1.13 | length 4546.7
  Top Layer w20: v2(1560,2380) 1610,2330 1900,2330 1925,2305 v2(1925,2240)
  Bottom Layer w20: 1520,2528.76 1520,2510.31 U1.9 U1.7 U1.5 U1.3 U1.1 1559.33,2380 v2(1560,2380) ; v2(1925,2240) 1930.53,2234.47 3819.47,2234.47 3945,2360 3945,2740 ; R5.2 R4.2 3664.68,2665 3785,2665 3860,2740 3945,2740 ; R1.1 3869.69,3439.69 3870,3440 ; P4.4 P4.3 3870,3440 ; 3870,3440 P4.2 P4.1 3945,3200 3945,2740
pads on no net: U1.15 U1.17 U1.57

## Text inside footprints (layer, text, board x,y; h text height)
P1: Top Overlay "39" at 3650,3575 h50; Top Overlay "40" at 3650,3675 h50; Top Overlay "2" at 1570,3675 h50; Top Overlay "1" at 1570,3575 h50
P2: Top Overlay "39" at 3655,2260 h50; Top Overlay "40" at 3655,2360 h50; Top Overlay "2" at 1575,2360 h50; Top Overlay "1" at 1575,2260 h50